# Altium PCB picr22RobodendronMainboard.PcbDoc
Units mm, origin at the board's own origin, x right, y up, seen from the top; angles counter-clockwise.
Board outline 54 x 74 mm, 4 copper layers (Top Layer, Layer 1, Layer 2, Bottom Layer), stack 0.603 mm thick; 66 components, 52 nets, 252 pads, 27 vias.
Unrouted connection lines stored in the file: 123.
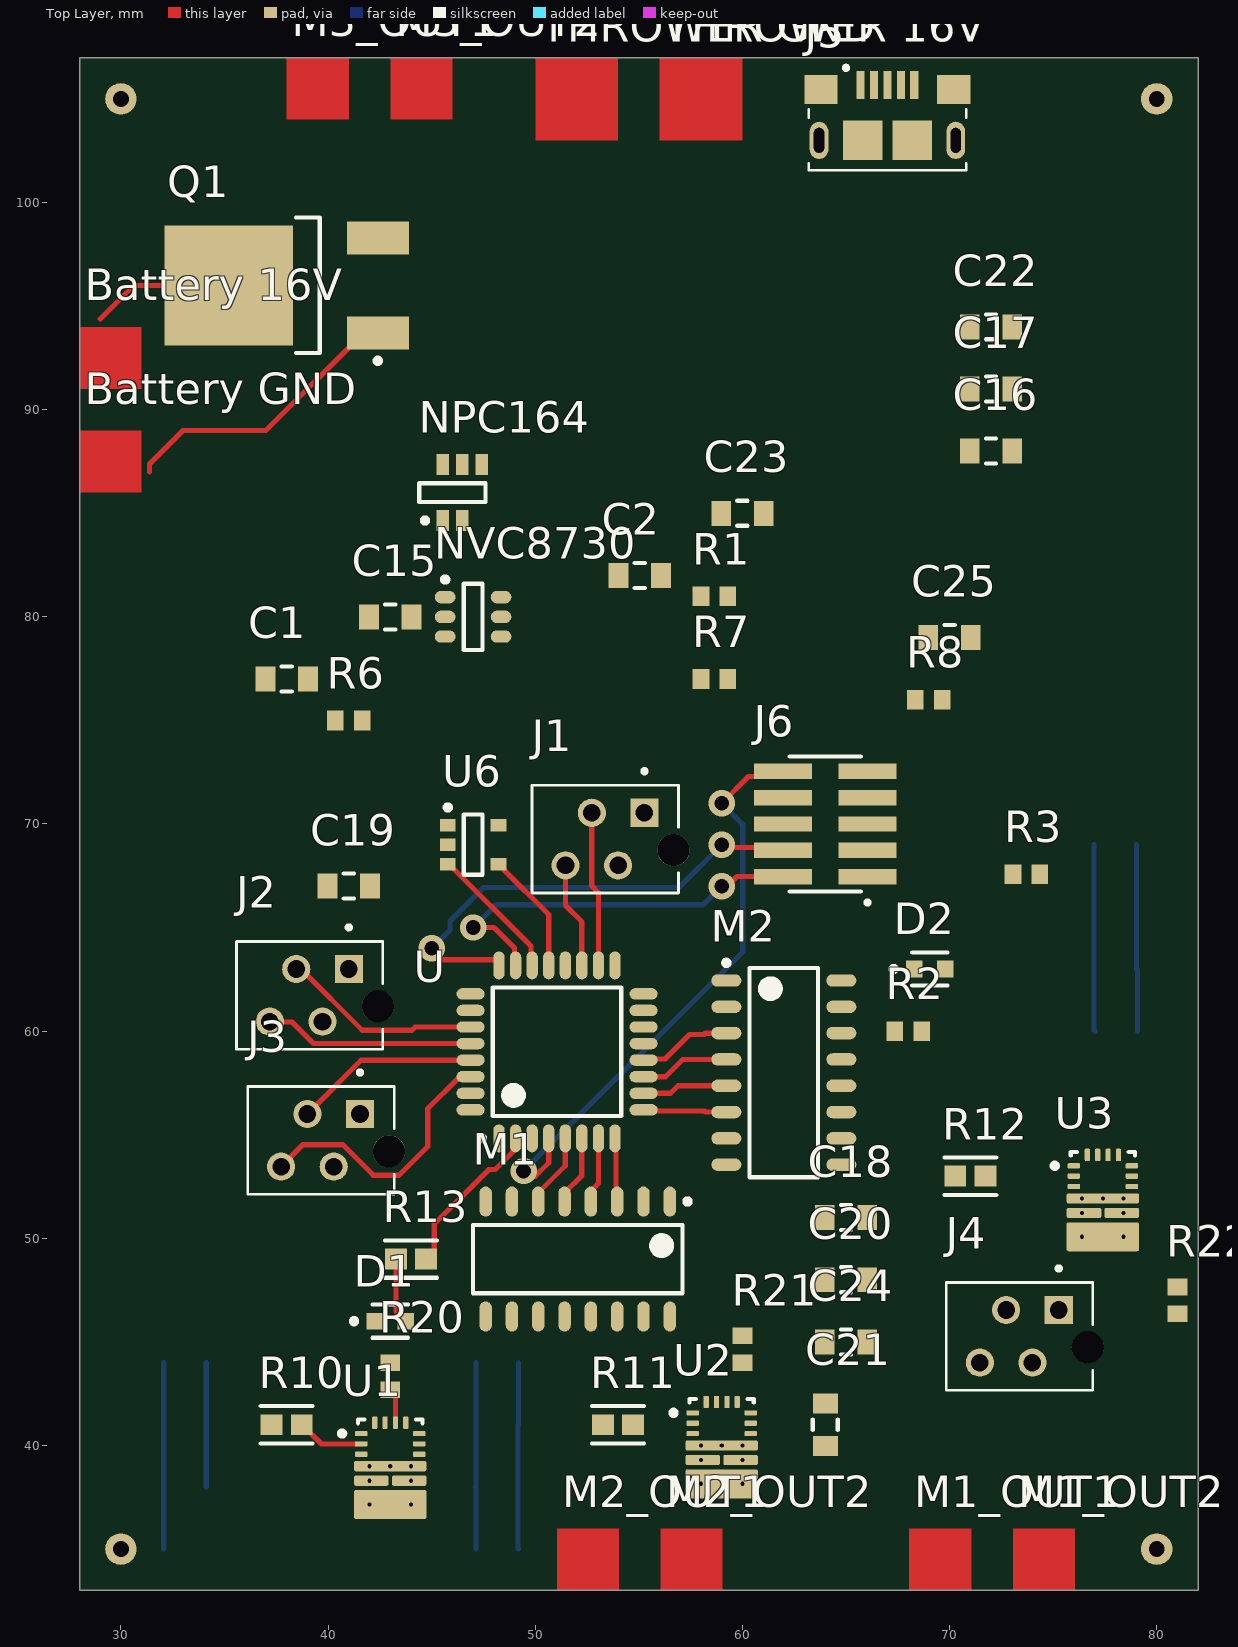
[diagram p0: Top Layer view]
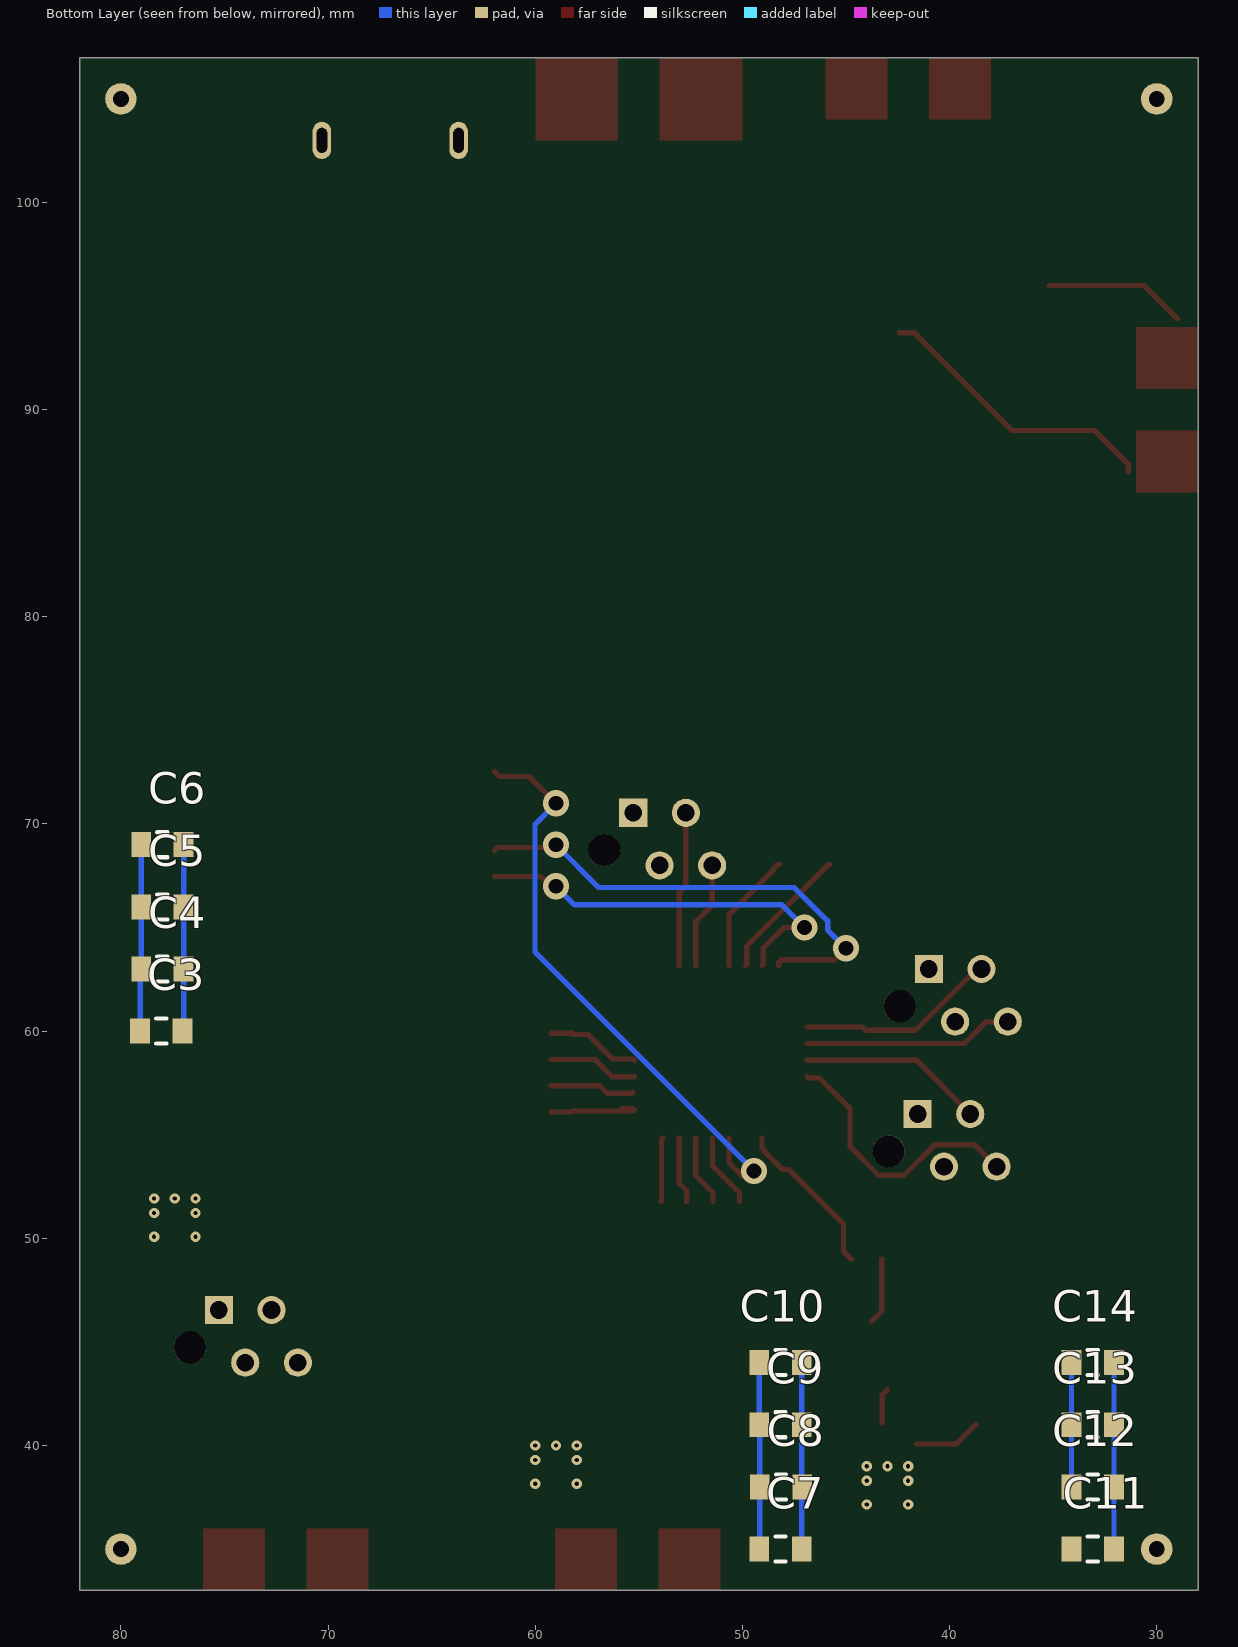
[diagram p1: Bottom Layer view, seen from below]

## Layer stack, top to bottom
Top Solder: solder mask 0.0102, Solder Resist, Dk 3.5
Top Layer: signal copper 0.0356
Dielectric 2: prepreg 0.0711, PP-006, Dk 4.1
Layer 1: signal copper 0.035
Dielectric 1: dielectric 0.32, FR-4, Dk 4.8
Layer 2: signal copper 0.035
Dielectric 3: prepreg 0.0711, PP-006, Dk 4.1
Bottom Layer: signal copper 0.0356
Bottom Solder: solder mask 0.0102, Solder Resist, Dk 3.5

## Board outline
28,107 82,107 82,33 28,33

## Design rules (kind name [scope] priority, off if disabled: settings)
Clearance [All] p1: gap=0.254 ignorepadtopadclearanceinfootprint=FALSE except(0: Arc-Hole Track-Hole SMDPad-Hole THPad-Hole Via-Hole Fill-Hole Poly-Hole Region-Hole Text-Hole)
PolygonConnect [All] p1: connectstyle=Relief reliefconductorwidth=0.254 reliefentries=4 polygonreliefangle="90 Angle" airgapwidth=0.254
RoutingVias [All] p1: holewidth=0.711 width=1.27 viastyle="Through Hole" minholewidth=0.711 minwidth=1.27 maxholewidth=0.711 maxwidth=1.27
SolderMaskExpansion [All] p1: expansion=0.102 istentingtop=FALSE
Width [All] p1: maxlimit=0.254 minlimit=0.254 preferedwidth=0.254
30 further rules are at their usual default settings.

## Components (designator, comment, footprint, x,y, rotation, side; value= is the part's Value field where it differs from the comment)
"Battery 16V" "soldering pad" PCBComponent_1#1 31,91 r90 top
"Battery GND" "soldering pad" PCBComponent_1#1 31,86 r90 top
C1 "100n" FP-CGA3E-0_3-0_1-IPC_A 38,77 r0 top
C2 "100n" FP-CGA3E-0_3-0_1-IPC_A 55.05,82 r0 top
C3 "100n" FP-CGA3E-0_3-0_1-IPC_A 78.048,60 r180 bottom
C4 "100n" FP-CGA3E-0_3-0_1-IPC_A 77.998,63 r180 bottom
C5 "100n" FP-CGA3E-0_3-0_1-IPC_A 77.998,66 r180 bottom
C6 "100n" FP-CGA3E-0_3-0_1-IPC_A 77.998,69 r180 bottom
C7 "100n" FP-CGA3E-0_3-0_1-IPC_A 48.162,35 r180 bottom
C8 "100n" FP-CGA3E-0_3-0_1-IPC_A 48.137,38 r180 bottom
C9 "100n" FP-CGA3E-0_3-0_1-IPC_A 48.162,41 r180 bottom
C10 "100n" FP-CGA3E-0_3-0_1-IPC_A 48.162,44 r180 bottom
C11 "100n" FP-CGA3E-0_3-0_1-IPC_A 33.09,35 r180 bottom
C12 "100n" FP-CGA3E-0_3-0_1-IPC_A 33.09,38 r180 bottom
C13 "100n" FP-CGA3E-0_3-0_1-IPC_A 33.09,41 r180 bottom
C14 "100n" FP-CGA3E-0_3-0_1-IPC_A 33.09,44 r180 bottom
C15 "100n" FP-CGA3E-0_3-0_1-IPC_A 43,80 r0 top
C16 "100n" FP-CGA3E-0_3-0_1-IPC_A 72,88 r0 top
C17 "100n" FP-CGA3E-0_3-0_1-IPC_A 72,91 r0 top
C18 "100n" FP-CGA3E-0_3-0_1-IPC_A 65,51 r0 top
C19 "100n" FP-CGA3E-0_3-0_1-IPC_A 41,67 r0 top
C20 "100n" FP-CGA3E-0_3-0_1-IPC_A 65,48 r180 top
C21 "100n" FP-CGA3E-0_3-0_1-IPC_A 64,41 r90 top
C22 "100n" FP-CGA3E-0_3-0_1-IPC_A 72,94 r0 top
C23 "100n" FP-CGA3E-0_3-0_1-IPC_A 60,85 r0 top
C24 "100n" FP-CGA3E-0_3-0_1-IPC_A 65,45 r0 top
C25 "100n" FP-CGA3E-0_3-0_1-IPC_A 70,79 r0 top
D1 "LTST-C191TBKT" FP-LTST-C191TBKT-MFG 43,46 r0 top
D2 "LTST-C191TBKT" FP-LTST-C191TBKT-MFG 69.05,63 r0 top
J1 "215079-4" TE_215079-4 55.27,70.54 r0 top
J2 "215079-4" TE_215079-4 41,63 r0 top
J3 "215079-4" TE_215079-4 41.54,56 r0 top
J4 "215079-4" TE_215079-4 75.27,46.54 r0 top
J5 "10118193-0001LF" FCI_10118193-0001LF 67,103 r0 top
J6 "FTSH-105-XX-X-DV" SAMTEC_FTSH-105-XX-X-DV 64,70 r90 top
M1 "MAX14930DASE+" SOIC127P600X175-16N 52.05,49 r270 top
M1_OUT1 "soldering pad" PCBComponent_1#1 71.05,33 r90 top
M1_OUT2 "soldering pad" PCBComponent_1#1 76.05,33 r90 top
M2 "MAX14930DASE+" SOIC127P600X175-16N 62,58 r0 top
M2_OUT1 "soldering pad" PCBComponent_1#1 54.05,33 r90 top
M2_OUT2 "soldering pad" PCBComponent_1#1 59.05,33 r90 top
M3_OUT1 "soldering pad" PCBComponent_1#1 41,104 r90 top
M3_OUT2 "soldering pad" PCBComponent_1#1 46,104 r90 top
NPC164 "NPC164" TSOP95P280X110-5N 46,86 r90 top
NVC8730 "NVC8730" TSOP95P280X110-6N 47,80 r0 top
Q1 "NTD25P03LT4G" ONSC-DPAK-3-369C-01_V 38,96 r180 top
R1 "10k" RESC1609X50X30NL8T20 58.65,81 r0 top
R2 "10k" RESC1609X50X30NL8T20 68,60 r0 top
R3 "10k" RESC1609X50X30NL8T20 73.71,67.58 r0 top
R6 "10k" RESC1609X50X30NL8T20 41,75 r0 top
R7 "10k" RESC1609X50X30NL8T20 58.65,77 r0 top
R8 "10k" RESC1609X50X30NL8T20 69,76 r0 top
R10 "3.3k" FP-ERA3A-IPC_B 38,41 r180 top
R11 "3.3k" FP-ERA3A-IPC_B 54,41 r180 top
R12 "3.3k" FP-ERA3A-IPC_B 71,53 r180 top
R13 "3.3k" FP-ERA3A-IPC_B 44,49 r0 top
R20 "10k" RESC1609X50X30NL8T20 43,43.35 r270 top
R21 "10k" RESC1609X50X30NL8T20 60,44.65 r90 top
R22 "10k" RESC1609X50X30NL8T20 81,47 r90 top
"THROWER 16V" "soldering pad" PCBComponent_1#2 60,103 r90 top
"THROWER GND" "soldering pad" PCBComponent_1#2 54,103 r90 top
U "STM32441KxT" TQFP80P890X890X160-32N 51.05,59 r90 top
U1 "DRV8243HQRXYRQ1" FP-RXY0014A-MFG 43,38.95 r0 top
U2 "DRV8243HQRXYRQ1" FP-RXY0014A-MFG 59,39.95 r0 top
U3 "DRV8243HQRXYRQ1" FP-RXY0014A-MFG 77.4,51.875 r0 top
U6 "CM1223-02SO" ONSC-SOT23-5-527AH-01_L 47,69 r0 top

## Footprints (in the part's own frame and the unit in brackets; to place one, negate y for a bottom-side part, rotate by r counter-clockwise, add the part's x,y. Pads: shape width x height; smd on the part's side, far side on the other; paste and mask are expansions set on the pad)
FCI_10118193-0001LF [mm]
  rect 0.4x1.35 smd: 1(-1.3,2.675) 2(-0.65,2.675) 3(0,2.675) 4(0.65,2.675) 5(1.3,2.675)
  rect 1.6x1.4 smd: S1(-3.2,2.45) S2(3.2,2.45)
  rect 1.9x1.9 smd: S3(1.2,0) S4(-1.2,0)
  oval 0.9x1.8 hole 0.5 slot 1.2 at 90 deg: S5(-3.3,0) S6(3.3,0)
  round 0.5 hole 0.5 unplated: ""(-3.3,0) ""(3.3,0)
  silkscreen extent -3.8,-1.45 3.8,3.6
FP-CGA3E-0_3-0_1-IPC_A [mm]
  rect 0.956x1.206 smd paste+0 mask+0: 1(-1.025,0) 2(1.025,0)
  silkscreen extent -0.25,-0.6 0.25,0.6, body extent -2,-1.1 2,1.1, height 0.25
FP-ERA3A-IPC_B [mm]
  rect 1.055x1.006 smd paste+0 mask+0: 1(-0.726,0) 2(0.726,0)
  silkscreen extent -1.25,-0.9 1.25,0.9, body extent -1.5,-0.75 1.5,0.75, height 0.25
FP-LTST-C191TBKT-MFG [mm]
  rect 0.8x0.8 smd paste+0 mask+0: 1(-0.75,0) 2(0.75,0)
  silkscreen extent -1.87,-0.8 0.85,0.8, body extent -1.25,-0.55 1.25,0.55, height 0.25
FP-RXY0014A-MFG [mm]
  rrect40% 0.6x0.25 smd paste+0 mask-1000: 1(-1.4,1.625) 2(-1.4,1.125) 3(-1.4,0.625) 8(1.4,0.625) 9(1.4,1.125) 10(1.4,1.625)
  rrect40% 3.5x0.5 smd paste-1000 mask-1000: 4(0,0.05)
  rrect40% 1.675x0.5 smd paste-1000 mask-1000: 5(-0.913,-0.65) 7(0.913,-0.65)
  rrect14% 3.5x1.4 smd paste-1000 mask-1000: 6(0,-1.8)
  rrect40% 0.25x0.6 smd paste+0 mask-1000: 11(0.75,2.15) 12(0.25,2.15) 13(-0.25,2.15) 14(-0.75,2.15)
  silkscreen extent -2.45,1.5 1.55,2.3, body extent -1.85,-2.6 1.85,2.55, height 0.25
ONSC-DPAK-3-369C-01_V [mm] "DPAK, 3-Leads, Body 6.54x6.095mm, Pitch 2.29mm"
  rect 3x1.6 smd: 1(-4.4,2.29) 3(-4.4,-2.29)
  rect 6.2x5.8 smd: 4(2.8,0)
  silkscreen extent -4.53,-3.27 -0.45,3.76, body extent -1.6,-3.27 4.49,3.27, height 2.38
ONSC-SOT23-5-527AH-01_L [mm] "SOT23, 5-Leads, Body 2.9x1.6mm, Pitch 0.95mm, IPC High Density"
  rect 0.75x0.6 smd: 1(-1.225,0.95) 2(-1.225,0) 3(-1.225,-0.95) 4(1.225,-0.95) 5(1.225,0.95)
  silkscreen extent -1.35,-1.45 0.45,1.92, body extent -0.8,-1.45 0.8,1.45, height 1.45
PCBComponent_1#1 [mm]
  Top Layer region: 0,0 3,0 3,3 0,3
PCBComponent_1#2 [mm]
  Top Layer region: 0,0 4,0 4,4 0,4
RESC1609X50X30NL8T20 [mm] "Chip Resistor, 2-Leads, Body 1.65x0.95mm, IPC Medium Density"
  rect 0.8x0.95 smd: 1(-0.65,0) 2(0.65,0)
  body extent -0.82,-0.48 0.82,0.48, height 0.5
SAMTEC_FTSH-105-XX-X-DV [mm]
  rect 0.74x2.79 smd: 01(-2.54,-2.035) 02(-2.54,2.035) 03(-1.27,-2.035) 04(-1.27,2.035) 05(0,-2.035) 06(0,2.035) 07(1.27,-2.035) 08(1.27,2.035) 09(2.54,-2.035) 10(2.54,2.035)
  silkscreen extent -3.89,-2.13 3.26,1.72
SOIC127P600X175-16N [mm] "SOIC, 16-Leads, Body 9,90x3,90mm, Pitch 1,27mm, IPC Medium Density"
  oval 1.45x0.6 smd: 1(-2.775,4.445) 2(-2.775,3.175) 3(-2.775,1.905) 4(-2.775,0.635) 5(-2.775,-0.635) 6(-2.775,-1.905) 7(-2.775,-3.175) 8(-2.775,-4.445) 9(2.775,-4.445) 10(2.775,-3.175) 11(2.775,-1.905) 12(2.775,-0.635) 13(2.775,0.635) 14(2.775,1.905) 15(2.775,3.175) 16(2.775,4.445)
  silkscreen extent -2.9,-5.05 1.65,5.42, body extent -3,-5.05 3,5.05, height 1.75
TE_215079-4 [mm]
  rect 1.358x1.358 hole 0.85: 1(0,0)
  round 1.358 hole 0.85: 2(-1.27,-2.54) 3(-2.54,0) 4(-3.81,-2.54)
  round 1.55 hole 1.55 unplated: ""(1.4,-1.8)
  silkscreen extent -5.43,-3.87 1.65,2.11
TQFP80P890X890X160-32N [mm] "TQFP, 32-Leads, Body 7,00x7,00mm, Pitch 0,80mm, IPC Medium Density"
  oval 1.35x0.55 smd: 1(-4.175,2.8) 2(-4.175,2) 3(-4.175,1.2) 4(-4.175,0.4) 5(-4.175,-0.4) 6(-4.175,-1.2) 7(-4.175,-2) 8(-4.175,-2.8) 17(4.175,-2.8) 18(4.175,-2) 19(4.175,-1.2) 20(4.175,-0.4) 21(4.175,0.4) 22(4.175,1.2) 23(4.175,2) 24(4.175,2.8)
  oval 0.55x1.35 smd: 9(-2.8,-4.175) 10(-2,-4.175) 11(-1.2,-4.175) 12(-0.4,-4.175) 13(0.4,-4.175) 14(1.2,-4.175) 15(2,-4.175) 16(2.8,-4.175) 25(2.8,4.175) 26(2,4.175) 27(1.2,4.175) 28(0.4,4.175) 29(-0.4,4.175) 30(-1.2,4.175) 31(-2,4.175) 32(-2.8,4.175)
  silkscreen extent -4.3,-3.1 3.1,3.75, body extent -4.45,-4.45 4.45,4.45, height 1.6
TSOP95P280X110-5N [mm] "TSOP, 5-Leads, Body 3,00x1,50mm, Pitch 0,95mm, IPC Medium Density"
  rect 1x0.6 smd: 1(-1.35,0.475) 2(-1.35,-0.475) 3(1.35,-1.425) 4(1.35,-0.475) 5(1.35,0.475)
  silkscreen extent -1.47,-1.6 0.45,1.6, body extent -1.38,-1.6 1.38,1.6, height 1.1
TSOP95P280X110-6N [mm] "TSOP, 6-Leads, Body 3,00x1,50mm, Pitch 0,95mm, IPC Medium Density"
  oval 1x0.6 smd: 1(-1.35,0.95) 2(-1.35,0) 3(-1.35,-0.95) 4(1.35,-0.95) 5(1.35,0) 6(1.35,0.95)
  silkscreen extent -1.47,-1.6 0.45,1.92, body extent -0.85,-1.6 0.85,1.6, height 1.1

## Part data
C1 C2 C3 C4 C5 C6 C7 C8 C9 C10 C11 C12 C13 C14 C15 C16 C17 C18 C19 C20 C21 C22 C23 C24 C25: library part CMP-2000-07546-2, "Cap Ceramic 100nF 50V X7R 10% Pad SMD 0603 +125°C Automotive T/R", Capacitance=100nF, Case Code (Imperial)=0603, Case Code (Metric)=1608, Dielectric=X7R, Max Operating Temperature=125°C, Min Operating Temperature=-55°C, Package Quantity=1, Ratings=AEC-Q200, Tolerance=10%, Voltage=50V, Case/Package=0603, Composition=Ceramic, Depth=0.8mm, Height=0.8mm, Lead Free="Lead Free", Length=1.6mm, Mount="Surface Mount", Packaging="Tape and Reel", Radiation Hardening=No, REACH SVHC="No SVHC", Termination=SMD/SMT, Thickness=0.035inch, Voltage Rating=50V, Voltage Rating (DC)=50V, Weight=7.1E-05oz, Width=0.8mm
D1 D2: library part CMP-22017-000008-1, "LED BLUE CLEAR CHIP SMD", Case Code (Imperial)=0603, Case Code (Metric)=1608, Color=Blue, Forward Current=20mA, Forward Voltage=3.8V, Lens Color=Colorless, Max Operating Temperature=80°C, Max Power Dissipation=75mW, Min Operating Temperature=-20°C, Package Quantity=1, Power Dissipation=76mW, Reverse Voltage=5V, Case/Package=0603, Depth=1.6mm, Dominant Wavelength=475nm, Height=0.55mm, Illumination Color=Blue, Lead Free="Lead Free", Length=0.8mm, Lens Style=Diffused, Lens Transparency=Clear, Luminous Intensity=180mcd, Mount="Surface Mount", Number of Elements=1, Number of LEDs=1, Number of Pins=2, Packaging="Tape and Reel", Radiation Hardening=No, Test Current=20mA, Viewing Angle=130°, Wavelength=468nm, Width=0.8mm
J1 J2 J3 J4: "4 Position Receptacle Connector Through Hole", Package="SMD-6 Omron Electronics", Availability=Unavailable, EU_RoHS_Compliance=Compliant, MF="TE Connectivity", MP=215079-4, Price=None, SnapEDA_Link=https://www.snapeda.com/parts/215079-4/TE%20Connectivity%20AMP%20Connectors/view-part/2366486/?ref=snap, TE_purchase_URL=https://www.te.com/usa-en/product-215079-4.html?te_bu=Cor&te_type=disp&te_campaign=seda_glo_cor-seda-global-disp-prtnr-fy19-seda-model-bom-cta_sma-317_1&elqCampaignId=32493
J5: "USB - micro B USB 2.0 Receptacle Connector 5 Position Surface Mount, Right Angle; Through Hole", Package=None, Availability=Unavailable, MF="Amphenol ICC", MP=10118193-0001LF, Price=None, SnapEDA_Link=https://www.snapeda.com/parts/10118193-0001LF/Amphenol%20FCI/view-part/2758989/?ref=snap
J6: "Connector Header Surface Mount 10 position 0.050\" (1.27mm)", Package=None, Availability=Unavailable, MP=FTSH-105-XX-X-DV, Price=None
Q1: library part CMP-1058-00409-1, "Power MOSFET, -25 A, -30 V, Logic Level P-Channel, 3-Pin DPAK, Pb-Free, Tape and Reel", Manufacturer="On Semiconductor", Package Type=DPAK-3, Channel Polarity="P Channel", Ciss Typ (pF)=900, ComponentLink1Description="Manufacturer URL", ComponentLink1URL=http://www.onsemi.com/, ComponentLink2Description=Datasheet, ComponentLink2URL=http://www.onsemi.cn/pub_link/Collateral/NTD25P03L-D.PDF, ComponentLink3Description="Package Specification", ComponentLink3URL=http://www.onsemi.cn/pub_link/Collateral/369C.PDF, Configuration=Single, Coss Typ (pF)=290, Crss Typ (pF)=105, DatasheetVersion="Rev. 4", ID Max (A)=25, Mounting Technology="Surface Mount", PackageDescription="3-Pin Flange Mount, Body 6.54 x 6.095 mm, Pitch 2.29 mm", PackageReference=DPAK-3-369C-01, PackageVersion="Rev. E, 02/2014", Packing="Tape and Reel", PartNumber=NTD25P03LT4G, PD Max (W)=75, Qrr Typ (nC)=35, RoHS=Pb-Free, V(BR)DSS Min (V)=30, VGS Max (V)=15, VGS(th) Max (V)=2
R1 R2 R3 R6 R7 R8 R20 R21 R22: library part CMP-1666-00005-4, "Chip Resistor, 10 KOhm, +/- 1%, 100 mW, -55 to 155 degC, 0603 (1608 Metric), RoHS, Tape and Reel", Manufacturer="Vishay Semiconductor", Max Operating Temperature="155 degC", Min Operating Temperature="-55 degC", Package Quantity=5000, Voltage Rating="75 V", ComponentLink1Description="Manufacturer URL", ComponentLink1URL=http://www.vishay.com/, ComponentLink2Description=Datasheet, ComponentLink2URL=https://datasheet.ciiva.com/11809/0900766b80d98afc-11809037.pdf, DatasheetVersion=06/2012, Height="0.45 mm", Length="1.55 mm", Mounting Technology="Surface Mount", PackageDescription="2-Pin Surface Mount Device, Body 1.575 x 0.85 mm", PackageReference=0603, Packaging="Tape and Reel", REACH SVHC=Unknown, RoHSCompliant=true
R10 R11 R12 R13: library part CMP-2000-00040-2, "RES SMD 3.3K OHM 0.1% 1/10W 0603", Case Code (Imperial)=0603, Case Code (Metric)=1608, Max Operating Temperature=155°C, Max Power Dissipation=100mW, Min Operating Temperature=-55°C, Package Quantity=1, Resistance=3.3kR, Resistance Tolerance=0.1%, Resistor Type="Thin Film", Temperature Coefficient=25ppm/°C, Voltage Rating=75V, Case/Package=0603, Construction=Rectangular, Contact Plating=Tin, Depth=0.8mm, Features="Automotive AEC-Q200", Height=0.45mm, Lead Free="Lead Free", Length=1.6mm, Military Standard=Not, Mount="Surface Mount", Number of Pins=2, Number of Terminations=2, Packaging="Tape and Reel", Power Rating=100mW, Radiation Hardening=No, REACH SVHC="No SVHC", RoHS Compliant=Yes, Series=ERA-3A, Size Code=0603, Technology="METAL FILM", Termination=SMD/SMT, Tolerance=0.1%, Voltage Rating (DC)=75V, Width=0.8mm
U: library part STM32441
U1 U2 U3: library part CMP-04915-000088-1, "Automotive 40-V, 12-A H-Bridge driver with integrated current sensing and feedback 14-VQFN-HR -40 to 125"
U6: library part CMP-1063-00173-1, "Industry First Low Capacitance ESD Protection Arrays with Backdrive Protection, 5-Pin SOT-23, Pb-Free, Tape and Reel", Manufacturer="On Semiconductor", C Max (pF)=1.5, Code_JEDEC=MO-178, ComponentLink1Description="Manufacturer URL", ComponentLink1URL=http://www.onsemi.com/, ComponentLink2Description=Datasheet, ComponentLink2URL=http://www.onsemi.com/pub_link/Collateral/CM1223-D.PDF, ComponentLink3Description="Package Specification", ComponentLink3URL=http://www.onsemi.com/pub_link/Collateral/527AH.PDF, DatasheetVersion="Rev. 6", Direction=Unidirectional, Mounting Technology="Surface Mount", Number of Lines=2, PackageDescription="5-Pin Small Outline Transistor, Body 2.9 x 1.6 mm, Pitch 0.95 mm", PackageReference=SOT23-5-527AH-01, PackageVersion="Rev. O, 12/2008", Packing="Tape and Reel", PartNumber=CM1223-02SO, PPK Max (W)=0.225, RoHS=Pb-Free

## Free pads (board coordinates)
  round 1.524 hole 0.762: 3(30,105) 4(80,105) 5(80,35) 6(30,35)

## Via types
v1: diameter 0.5, hole 0.2, Top Layer to Bottom Layer, 21 vias
v2: diameter 1.27, hole 0.711, Top Layer to Bottom Layer, 6 vias

## Nets (pads, with @x,y where several pads share a name; then routed paths per layer and width w, separated by ;. In a path a pad name is that pad's centre, name@x,y a point inside that pad or via, vN(x,y) a via of type N, cw(c..) or ccw(c..) an arc to the next point about the centre after c; other vN are vias at no path point)
+3.3V: C1.1 C15.1 C18.1 C19.2 C20.2 C21.2 J1.2 J2.2 J3.2 J6.01 M1.1 M2.1 NPC164.4 U.1 U.15 U.17
+5V: C2.2 C16.1 C17.1 C23.1 C25.1 J5.1 M1.16 M2.16 NPC164.1 NVC8730.5 R2.1 R7.1 R8.1 U6.5
+16V: C3.1 C4.1 C5.1 C6.1 C7.1 C8.1 C9.1 C10.1 C11.1 C12.1 C13.1 C14.1 C22.1 NVC8730.1 Q1.3 U1.4 U2.4 U3.4 | length 24
  Bottom Layer w0.254: C12.1 C13.1 C14.1 ; C7.1 49.162,35.025 C8.1 49.162,40.975 C9.1 C10.1 ; C6.1 C5.1 C4.1 79.073,62.95 C3.1
  other v1: 42,39 43,39 44,39 58,40 59,40 60,40 76.4,51.925 77.4,51.925 78.4,51.925
GND: C1.2 C2.1 C15.2 C18.2 C19.1 C20.1 C21.1 C24.2 C25.2 D1.1 J1.1 J2.1 J3.1 J4.1 J5.5 J5.S1 J5.S2 J5.S3 J5.S4 J5.S5 J5.S6 J6.03 J6.05 J6.09 M1.2 M1.8 M2.2 M2.8 NPC164.2 R1.1 R3.1 R6.1 U6.2 U.14 U.16 U.32
"GND PWR": C3.2 C4.2 C5.2 C6.2 C7.2 C8.2 C9.2 C10.2 C11.2 C12.2 C13.2 C14.2 C16.2 C17.2 C22.2 C23.2 D2.1 M1.10 M1.15 M2.10 M2.15 NVC8730.2 Q1.1 R10.2 R11.2 R12.2 R20.1 R21.1 R22.1 U1.6 U1.11 U1.14 U2.6 U2.11 U2.14 U3.6 U3.11 U3.14 | length 41.1
  Top Layer w0.254: 31.381,87 31.381,87.381 33,89 36.99,89 41.7,93.71 Q1.1
  Bottom Layer w0.254: C11.2 C12.2 C13.2 C14.2 ; C7.2 47.137,37.975 C8.2 47.137,38.025 C9.2 C10.2 ; C6.2 C5.2 C4.2 76.973,60.05 C3.2
  other v1: 42,37.15 44,37.15 58,38.15 60,38.15 76.4,50.075 78.4,50.075
M1_DIR: M1.4 U.7 | length 3.2
  Top Layer w0.254: M1.4 52.685,52.294 53.05,52.659 U.7
M1_DIR_Driver: M1.12 U1.10
M1_ENCODER_CH1: J1.3 U.18 | length 7.5
  Top Layer w0.254: J1.3 52.73,67.003 53.05,66.683 U.18
M1_ENCODER_CH2: J1.4 U.19 | length 5.2
  Top Layer w0.254: J1.4 51.46,66.073 52.25,65.283 U.19
M1_PWM: M1.3 U.8 | length 3.1
  Top Layer w0.254: U.8 53.903,54.772 53.903,51.828 M1.3
M1_PWM_Driver: M1.11 U1.9
M2_DIR: M1.6 U.5 | length 3.6
  Top Layer w0.254: M1.6 50.145,52.2 51.45,53.505 U.5
M2_DIR_Driver: M1.14 U2.10
M2_ENCODER_CH1: J2.3 U.27 | length 9.7
  Top Layer w0.254: J2.3 38.689,63 41.645,60.044 44.052,60.044 44.208,60.2 U.27
M2_ENCODER_CH2: J2.4 U.28 | length 10.1
  Top Layer w0.254: J2.4 37.209,60.441 38.25,60.441 39.291,59.4 U.28
M2_PWM: M1.5 U.6 | length 3.4
  Top Layer w0.254: M1.5 51.415,52.2 52.25,53.035 U.6
M2_PWM_Driver: M1.13 U2.9
M3_DIR: M2.6 U.9 | length 4.7
  Top Layer w0.254: U.9@55.809,56.257 55.282,56.257 U.9 55.278,56.148 58.172,56.148 58.225,56.095 M2.6
M3_DIR_Driver: M2.14 U3.10
M3_ENCODER_CH1: J3.3 U.29 | length 9
  Top Layer w0.254: J3.3 41.6,58.6 U.29
M3_ENCODER_CH2: J3.4 U.30 | length 13.2
  Top Layer w0.254: J3.4 38.79,54.52 40.709,54.52 42.185,53.044 43.419,53.044 44.811,54.436 44.811,56.264 46.291,57.743 46.818,57.743 U.30
M3_PWM: M2.5 U.10 | length 4.1
  Top Layer w0.254: U.10@55.282,57.057 55.338,57 56.523,57 56.888,57.365 M2.5
M3_PWM_Driver: M2.13 U3.9
MCU_nSLEEP_ISOL: M2.4 U.11 | length 4.3
  Top Layer w0.254: U.11 56.288,57.8 57.119,58.631 58.221,58.631 58.225,58.635 M2.4
"NetBattery 16V_1": Q1.4 | length 6.9
  Top Layer w0.254: 29,94.381 30.619,96 Q1.4
NetD1_2: D1.2 R13.1 | length 3.2
  Top Layer w0.254: R13.1 43.274,46.476 D1.2
NetD2_2: D2.2 R8.2
NetM1_OUT1_1: U1.7
  other v1: 44,38.3
NetM1_OUT2_1: U1.5
  other v1: 42,38.3
NetM2_OUT1_1: U2.7
  other v1: 60,39.3
NetM2_OUT2_1: U2.5
  other v1: 58,39.3
NetM3_OUT1_1: U3.7
  other v1: 78.4,51.225
NetM3_OUT2_1: U3.5
  other v1: 76.4,51.225
NetNPC164_3: NPC164.3 R7.2
NetR1_2: R1.2 U3.8
NetR3_2: R3.2 U2.8
NetR6_2: R6.2 U1.8
NetR10_1: R10.1 U1.2 | length 3.3
  Top Layer w0.254: R10.1 38.75,41 39.675,40.075 U1.2
NetR11_1: R11.1 U2.2
NetR12_1: R12.1 U3.2
NetR13_2: R13.2 U.2 | length 7.8
  Top Layer w0.254: R13.2 44.75,49 45.126,49.376 45.126,50.684 47.76,53.318 48.07,53.318 48.906,54.153 48.906,54.201 49.05,54.345 U.2
NetR20_2: R20.2 U1.12 | length 1.7
  Top Layer w0.254: R20.2 43.25,42.45 U1.12
NetR21_2: R21.2 U2.12
NetR22_2: R22.2 U3.12
NRST: C24.1 J6.10 U.4 | length 28.9
  Top Layer w0.254: v2(49.437,53.248) 49.712,53.248 49.96,53 50,53 50.65,53.65 U.4 ; v2(59,71) 60.297,72.297 61.722,72.297 J6.10
  Bottom Layer w0.254: v2(49.437,53.248) 60.016,63.826 60.016,69.984 v2(59,71)
nSLEEP_Driver: M2.12 R2.2 U1.3 U2.3 U3.3
Programer_CLK: J6.04 U.24 | length 23.1
  Top Layer w0.254: v2(45,64) 45.552,63.448 48.113,63.448 48.25,63.311 U.24 ; v2(59,69) 59.135,68.865 61.83,68.865 J6.04
  Bottom Layer w0.254: v2(45,64) 45.887,64.887 45.887,65.324 47.503,66.94 56.94,66.94 v2(59,69)
Programer_DI0: J6.02 U.23 | length 19.2
  Top Layer w0.254: v2(47,65) 48,65 48.993,64.007 48.993,63.232 U.23 ; v2(59,67) 59.275,67 59.735,67.46 J6.02
  Bottom Layer w0.254: v2(47,65) 48.097,66.097 58.097,66.097 v2(59,67)
THROWER_PWM: M2.3 U.12 | length 4.5
  Top Layer w0.254: U.12 55.282,58.657 56.27,58.657 57.452,59.839 58.159,59.839 58.225,59.905 M2.3
THROWER_PWM_OUT: J4.2 M2.11
USB_D_M: J5.2 U6.4 U.21 | length 5.9
  Top Layer w0.254: U6.4 48.3,68.05 48.473,67.877 48.473,67.802 50.65,65.625 U.21
USB_D_P: J5.3 U6.3 U.22 | length 6.6
  Top Layer w0.254: U6.3 45.85,68.05 49.793,64.107 49.793,63.232 U.22
pads on no net: J1. J2. J3. J4. J4.3 J4.4 J5. J5.4 J6.06 J6.07 J6.08 M1.7 M1.9 M2.7 M2.9 NPC164.5 NVC8730.3 NVC8730.4 NVC8730.6 U1.1 U1.13 U2.1 U2.13 U3.1 U3.13 U6.1 U.3 U.13 U.20 U.25 U.26 U.31

## Text inside footprints (layer, text, board x,y; h text height)
J5: Mechanical 13 "PCB END" at 71.75,101.7 h0.41